# Altium PCB ESC.PcbDoc (part 2 of 2)
Units mil, origin at the board's own origin, x right, y up, seen from the top; angles counter-clockwise.
Board outline 7000 x 5000 mil, 2 copper layers (Top Layer, Bottom Layer), stack 64.567 mil thick; 83 components, 105 nets, 405 pads, 157 vias.
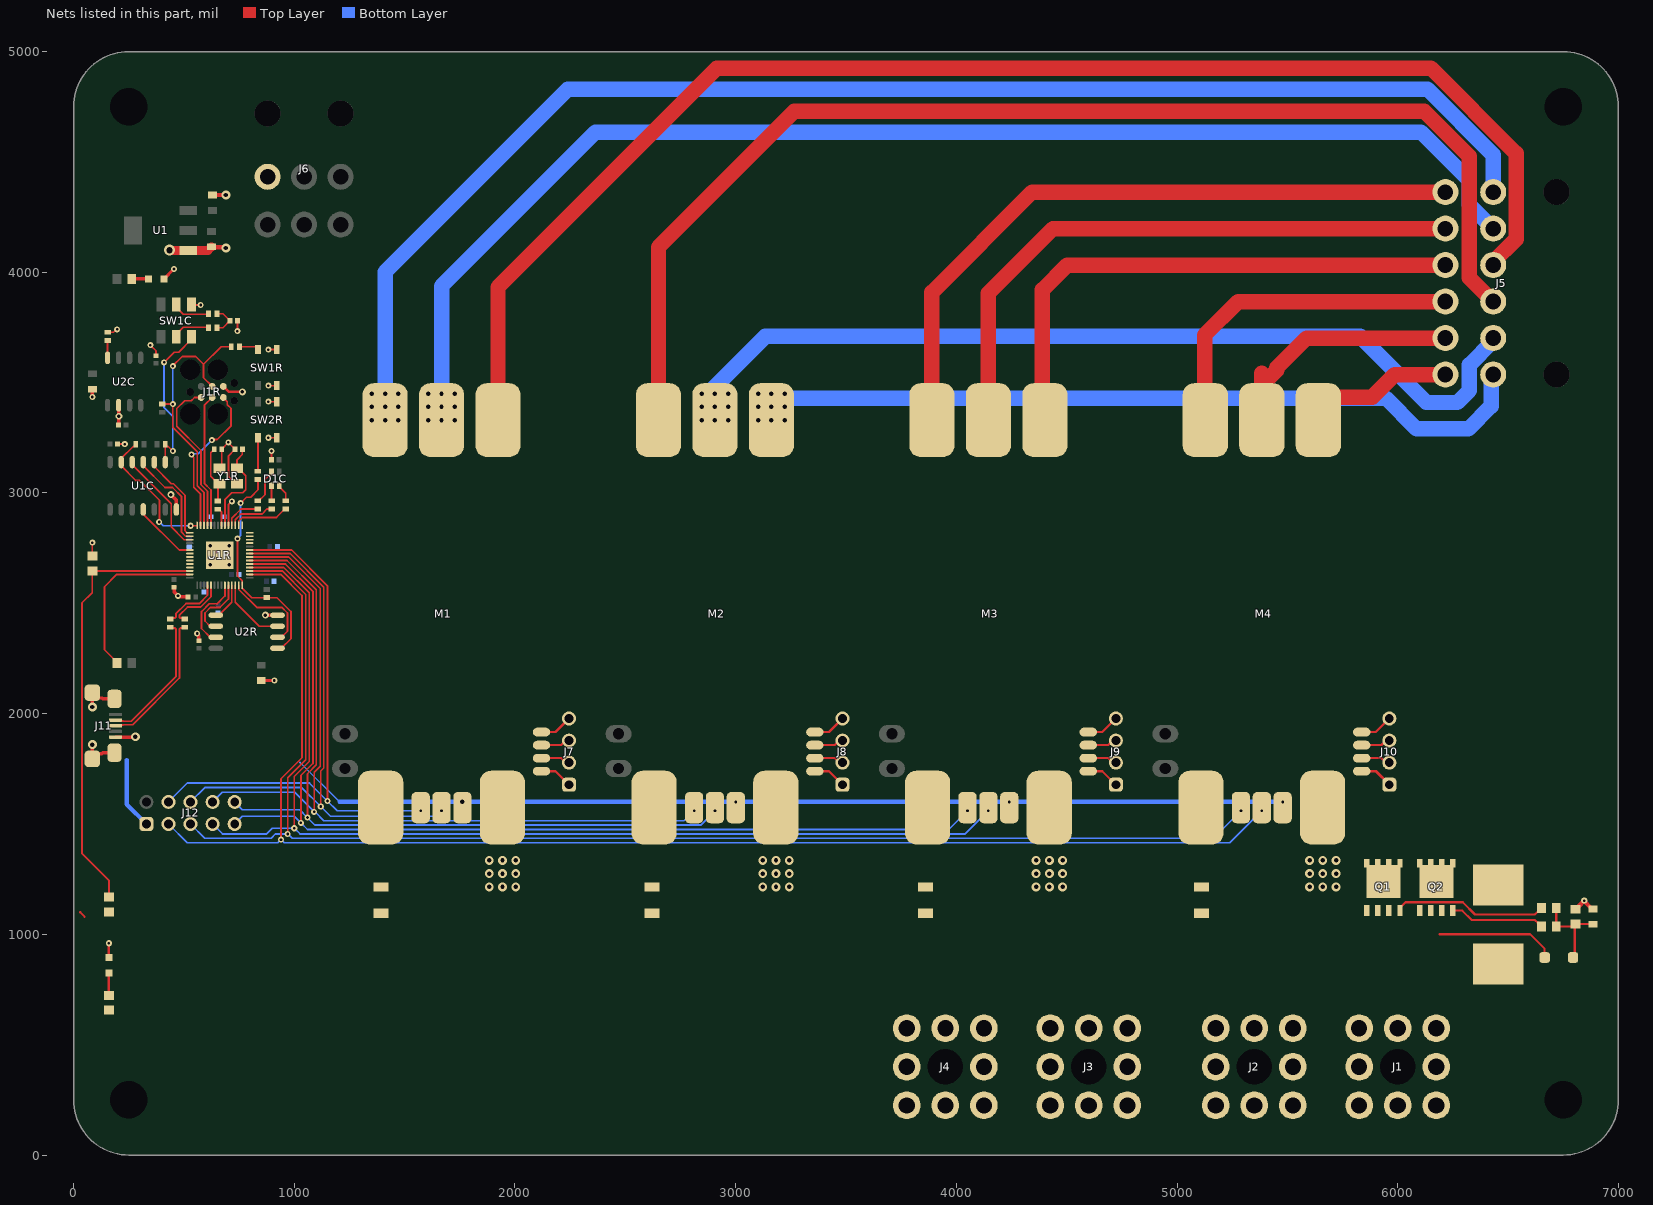
[diagram p2: the nets of this part, all layers, seen from the top]

## Via types
v1: diameter 40, hole 20, Top Layer to Bottom Layer, tented both sides, 81 vias
v2: diameter 27.56, hole 11.81, Top Layer to Bottom Layer, tented both sides, 34 vias
v3: diameter 28, hole 12, Top Layer to Bottom Layer, tented both sides, 25 vias
v4: diameter 31.5, hole 15.75, Top Layer to Bottom Layer, tented both sides, 10 vias
v5: diameter 45.28, hole 27.56, Top Layer to Bottom Layer, tented both sides, 6 vias
v6: diameter 50, hole 28, Top Layer to Bottom Layer, tented both sides, 1 vias

## Nets (pads, with @x,y where several pads share a name; then routed paths per layer and width w, separated by ;. In a path a pad name is that pad's centre, name@x,y a point inside that pad or via, vN(x,y) a via of type N, cw(c..) or ccw(c..) an arc to the next point about the centre after c; other vN are vias at no path point) (continued)
DBG_TX_RP2040: J1R.5 U1R.27 | length 714.8
  Top Layer w7.87: v2(534.17,3174.36) 534.17,3169.74 544.02,3159.9 544.02,3025.49 575.51,2993.99 U1R.27@575.51,2853 ; v2(626.32,3239.32) 629.47,3242.46 651.49,3242.46 713.7,3304.68 713.7,3382.86 696.83,3399.73 696.83,3412.76 678.27,3431.32 J1R.5@678.27,3432.82
  Bottom Layer w7.87: v2(534.17,3174.36) 537.9,3178.09 565.09,3178.09 v2(626.32,3239.32)
dGND: C1C.2 C1R.2 C2.2 C2C.1 C2R.2 C3.2 C3C.2 C3R.2 C4C.2 C4R.2 C5C.2 C5R.2 C6.2 C6R.2 C7.2 C7R.2 C8R.2 C9R.2 C10R.2 C11R.2 C12R.2 C13R.2 D3.2 J1R.6 J6.1 J11.5 J11.6 J11.7 J11.8 J11.9 J12.1 M1.10 M2.10 M3.10 M4.10 R4.2 R6C.2 SW1C.6 SW1R.B1 SW1R.B2 SW2R.B1 SW2R.B2 U1.1 U1C.7 U1R.19 U1R.57 U2C.2 U2R.4 Y1R.2 Y1R.4 | length 7202.2
  Top Layer w7.87: R4.2@85,2713.8 v3(85,2775) ; R6C.2@154.06,3728.49 180.63,3728.49 193.43,3741.29 v2(197.56,3741.29) ; v2(347.79,3669.8) 373.47,3644.11 373.47,3622.22 C3C.2@373.94,3621.76 ; SW1C.6@534.17,3853.49 536.14,3851.52 v2(575.51,3851.52) ; U1R.57@701.5,2764.91 v4(705.43,2760.97) ; U1R.19@701.5,2853 701.5,2946.01 v2(717.24,2961.76) ; v2(742.24,3733.41) C2C.1@742.24,3780.66 ; v2(882.6,3250.14) SW2R.B1@920,3250.14 ; v2(882.6,3413.53) SW2R.B2@920,3413.53 ; v2(882.6,3486.37) 916.14,3486.37 SW1R.B1@916.26,3486.25 ; v2(882.6,3649.75) SW1R.B2@920,3649.75
  Top Layer w8: C1C.2@196.81,3221.6 C1C.2@198.94,3221.6 v2(231.81,3221.6) ; Y1R.2@660.87,3111.37 671.38,3121.88 C2R.2@671.38,3197.98 671.38,3198.77 v2@701.5,3228.88 ; v2(701.5,3229.48) v2@701.5,3228.88 ; Y1R.4@740.87,3041.37 734.96,3041.37 701.43,3074.89 701.43,3167.01 731.61,3197.19 C1R.2@731.61,3197.98 731.61,3198.77 v2@701.5,3228.88 ; SW1R.B1@916.26,3486.25 SW1R.B1@918.94,3488.92
  Top Layer w9.84: C5C.2@896.97,3150.74 v2(896.97,3190.11)
  Top Layer w11.81: J1R.6@678.27,3482.82 703.18,3457.91 v4(764.81,3457.91)
  Top Layer w15: v1(85,1860) J11.8@85,1795.39 108.59,1818.99 127.43,1818.99 131.4,1822.95 J11.7@185.39,1822.95 ; v1(85,2030) J11.9@85,2094.61 108.59,2071.01 127.43,2071.01 131.4,2067.05 J11.6@185.39,2067.05 ; v3(85,3435) C3.2@85,3470 ; D3.2@410,3970 v3(455,4015) ; C2.2@850,2150 v3(910,2150)
  Top Layer w15.75: J11.5@190.32,1893.82 278.82,1893.82 v1(280,1895) ; C4C.2@204.06,3308.22 204.74,3308.9 204.74,3346.9 v4(205.43,3347.59) 204.74,3348.27 204.74,3397.09 U2C.2@204.06,3397.78 ; v4(441.12,2992.73) 465.67,2968.18 U1C.7@465.67,2925.34 ; C10R.2@457.4,2574.55 457.18,2574.33 457.18,2549.58 v2(473.15,2533.61) 476.35,2533.61 481.27,2528.69 C4R.2@519.02,2528.69 ; v2(559.76,2363.33) 567.64,2355.46 C3R.2@567.64,2330.46 ; v4(868.72,2446.21) U2R.4@923.99,2446.21
  Top Layer w20: C7.2@625,4115 627.5,4112.5 687.5,4112.5 v1(690,4110) ; C6.2@630,4350 v1(690,4350)
  Top Layer w40: v6(435,4100) 435.75,4099.25 519.18,4099.25 U1.1@519.49,4098.94 608.94,4098.94 C7.2@625,4115
  Bottom Layer w8: 1026.12,1778.88 1205,1600
  Bottom Layer w20: 240,1790 240,1590 J12.1@330,1500 ; 1205,1600 v1(1761.73,1600) v3(3000.68,1600) v3(4239.63,1600) v3(5478.58,1600)
  other v4: 618.82,2674.36 705.43,2674.36 618.82,2760.97
ESC1_P1: J5.1 M1.3 | length 6268.1
  Bottom Layer w70: v1(1411.34,3390) v1(1411.34,3450) 1411.34,4001.34 2240,4830 6135,4830 6432.6,4532.4 J5.1@6432.6,4363.39
  other v1: 1351.34,3330 1411.34,3330 1471.34,3330 1351.34,3390 1471.34,3390 1351.34,3450 1471.34,3450
ESC1_P2: J5.2 M1.4 | length 5846.7
  Bottom Layer w70: v1(1667.24,3390) 1667.24,3937.24 2365,4635 6105,4635 6325,4415 6325,4305.63 J5.2@6432.6,4198.03
  other v1: 1607.24,3330 1667.24,3330 1727.24,3330 1607.24,3390 1727.24,3390 1607.24,3450 1667.24,3450 1727.24,3450
ESC1_P3: J5.3 M1.5 | length 6336.4
  Top Layer w70: M1.5@1923.15,3330 1923.15,3455.98 1923.15,3499.29 1923.15,3542.6 1923.15,3933.15 2130,4140 2915,4925 6150,4925 6536.65,4538.35 6536.65,4149.75 6432.6,4045.7 J5.3@6432.6,4032.68
ESC1_PWM: J12.6 M1.9 U1R.8 | length 2641.8
  Top Layer w7.87: U1R.8@797.46,2725.54 981.66,2725.54 1133.77,2573.42 1133.77,1753.77 1120,1740 v3(1120,1579.13) ; v3(1667.24,1560) M1.9@1667.24,1574.09
  Bottom Layer w7.87: J12.6@530,1600 595,1665 1034.13,1665 v3(1120,1579.13) 1164.13,1535 1642.24,1535 v3(1667.24,1560)
ESC1_TELEM: J12.4 M1.8 U1R.9 | length 2639.1
  Top Layer w7.87: U1R.9@797.46,2741.29 988.38,2741.29 1150.24,2579.43 1150.24,2575.66 v3(1150.24,1604.13) ; v3(1572.76,1560.81) M1.8@1572.76,1574.09
  Bottom Layer w7.87: J12.4@430,1600 515.75,1685.75 1068.61,1685.75 v3(1150.24,1604.13) 1194.36,1560 1571.94,1560 v3(1572.76,1560.81)
ESC2_P1: J5.4 M2.3 | length 5501.2
  Top Layer w70: M2.3@2650.29,3330 2650.29,3455.98 2650.29,3499.29 2650.29,3542.6 2650.29,4114.3 3265.99,4730 6120,4730 6325,4525 6325,3974.92 J5.4@6432.6,3867.32
ESC2_P2: J5.5 M2.4 | length 4033.4
  Bottom Layer w70: v1(2906.19,3390) 2906.19,3481.19 3135,3710 5830,3710 6130,3410 6270,3410 6324.4,3464.4 6324.4,3580.75 6432.6,3688.95 J5.5@6432.6,3701.97
  other v1: 2846.19,3330 2906.19,3330 2966.19,3330 2846.19,3390 2966.19,3390 2846.19,3450 2906.19,3450 2966.19,3450
ESC2_P3: J5.6 M2.5 | length 3577.4
  Bottom Layer w70: v1(3162.1,3390) v1(3162.1,3450) v1(3222.1,3450) 3242.1,3430 5945.93,3430 6085.93,3290 6320,3290 6423.39,3393.39 6423.39,3527.41 J5.6@6432.6,3536.61
  other v1: 3102.1,3330 3162.1,3330 3222.1,3330 3102.1,3390 3222.1,3390 3102.1,3450
ESC2_PWM: J12.10 M2.9 U1R.6 | length 3667
  Top Layer w7.87: U1R.6@797.46,2694.04 967.18,2694.04 1100.13,2561.09 1100.13,1767.86 1060,1727.73 v3(1060,1529.13)
  Top Layer w8: v3(2906.19,1560) M2.9@2906.19,1574.09
  Bottom Layer w7.87: J12.10@730,1600 765,1565 1024.13,1565 v3(1060,1529.13) 1094.13,1495 ; 2841.19,1495 v3(2906.19,1560)
  Bottom Layer w8: 1094.13,1495 2841.19,1495
ESC2_TELEM: J12.8 M2.8 U1R.7 | length 3688.1
  Top Layer w7.87: U1R.7@797.46,2709.79 974.42,2709.79 1117.31,2566.9 1117.31,1762.31 1090,1735 v3(1090,1555) ; v3(2811.71,1560) M2.8@2811.71,1574.09
  Bottom Layer w7.87: J12.8@630,1600 673.7,1643.7 1001.3,1643.7 v3(1090,1555) 1094.15,1555 1134.15,1515 2765.85,1515 2810.85,1560 v3(2811.71,1560)
ESC3_P1: J5.7 M3.3 | length 3094.2
  Top Layer w70: M3.3@3889.24,3330 3889.24,3455.98 3889.24,3499.29 3889.24,3542.6 3889.24,3909.24 4343.39,4363.39 J5.7@6216.06,4363.39
ESC3_P2: J5.8 M3.4 | length 2767.4
  Top Layer w70: M3.4@4145.14,3330 4145.14,3455.98 4145.14,3499.29 4145.14,3542.6 4145.14,3905.14 4438.03,4198.03 J5.8@6216.06,4198.03
ESC3_P3: J5.9 M3.5 | length 2467.3
  Top Layer w70: M3.5@4401.05,3330 4390,3341.05 4390,3920 4502.68,4032.68 J5.9@6216.06,4032.68
ESC3_PWM: J12.7 M3.9 U1R.4 | length 5025.6
  Top Layer w7.87: U1R.4@797.46,2662.55 952.71,2662.55 1067.92,2547.33 1067.92,1782.92 1000,1715 v3(1000,1480.87)
  Top Layer w8: v3(4145.14,1560) M3.9@4145.14,1574.09
  Bottom Layer w7.87: J12.7@630,1500 675,1455 875,1455 900.87,1480.87 v3(1000,1480.87) 1025.87,1455 ; 4045.42,1460.28 v3(4145.14,1560)
  Bottom Layer w8: 1025.87,1455 4040.14,1455 4045.42,1460.28
ESC3_TELEM: J12.9 M3.8 U1R.5 | length 4819.2
  Top Layer w7.87: U1R.5@797.46,2678.29 959.95,2678.29 1084.39,2553.85 1084.39,1774.39 1030,1720 v3(1030,1505)
  Top Layer w8: v3(4050.66,1560) M3.8@4050.66,1574.09
  Bottom Layer w7.87: J12.9@730,1500 765,1535 1000,1535 v3(1030,1505) 1060,1475 ; 3975.9,1485.24 v3(4050.66,1560)
  Bottom Layer w8: 1060,1475 3965.66,1475 3975.9,1485.24
ESC4_P1: J5.10 M4.3 | length 1540.5
  Top Layer w70: M4.3@5128.19,3330 5125,3333.19 5125,3715 5277.32,3867.32 J5.10@6216.06,3867.32
ESC4_P2: J5.11 M4.4 | length 1134.7
  Top Layer w70: M4.4@5384.09,3330 5384.09,3455.98 5384.09,3499.09 5405.85,3520.85 5416.58,3520.85 5451.46,3555.73 5451.46,3566.46 5586.97,3701.97 J5.11@6216.06,3701.97 ; 5384.09,3499.29 5384.09,3520.85 5384.09,3542.6
ESC4_P3: J5.12 M4.5 | length 684.2
  Top Layer w70: M4.5@5640,3330 5640,3368.48 5706.13,3434.61 5884.61,3434.61 5986.61,3536.61 J5.12@6216.06,3536.61
ESC4_PWM: J12.3 M4.9 U1R.2 | length 6483.1
  Top Layer w7.87: U1R.2@797.46,2631.05 938.95,2631.05 1035,2535 1035,1800 940,1705 v3(940,1429.13)
  Bottom Layer w8: J12.3@430,1500 515,1415 925.31,1415 939.44,1429.13 v3(940,1429.13) ; v3@940.56,1429.13 954.69,1415 5239.09,1415 v3(5384.09,1560)
ESC4_TELEM: J12.5 M4.8 U1R.3 | length 6286.1
  Top Layer w7.87: U1R.3@797.46,2646.8 945.47,2646.8 1050.75,2541.52 ; v3(970,1455) 970,1710 1051.46,1791.46 1051.46,2541.52
  Top Layer w8: v3(5289.61,1560) M4.8@5289.61,1574.09
  Bottom Layer w7.87: J12.5@530,1500 595,1435 895,1435 915,1455 v3(970,1455) 990,1435 ; 5177.44,1447.83 v3(5289.61,1560)
  Bottom Layer w8: 990,1435 5164.61,1435 5177.44,1447.83
GND: C1.1 D1.2 J3.1 J4.1 M1.2 M2.2 M3.2 M4.2 R2.2 | length 179.7
  Top Layer w12: D1.2@160,895 v3(160,960)
  Top Layer w20: R2.2@6805,1113.5 6807.5,1113.5 6817.5,1123.5 6817.5,1125.34 v3(6845,1152.84) 6845,1150.67 6857.5,1138.17 6857.5,1137.5 6880,1115 C1.1@6885,1115
  other v1: 1883.68,1215 1943.68,1215 2003.68,1215 3122.63,1215 3182.63,1215 3242.63,1215 4361.58,1215 4421.58,1215 4481.58,1215 5600.53,1215 5660.53,1215 5720.53,1215 1883.68,1275 1943.68,1275 2003.68,1275 3122.63,1275 3182.63,1275 3242.63,1275 4361.58,1275 4421.58,1275 4481.58,1275 5600.53,1275 5660.53,1275 5720.53,1275 1883.68,1335 1943.68,1335 2003.68,1335 3122.63,1335 3182.63,1335 3242.63,1335 4361.58,1335 4421.58,1335 4481.58,1335 5600.53,1335 5660.53,1335 5720.53,1335
INT_RP2CAN: U1C.4 U1R.34 | length 297.2
  Top Layer w7.87: U1C.4@315.67,2925.34 315.67,2904.35 478.73,2741.29 U1R.34@524.33,2741.29
LEDB_RP2CAN: R8C.1 U1R.18 | length 168.1
  Top Layer w7.87: U1R.18@717.24,2853 717.24,2885.86 758.7,2927.31 R8C.1@835.35,2927.31
LEDG_RP2CAN: R7C.1 U1R.17 | length 213.3
  Top Layer w7.87: U1R.17@732.99,2853 732.99,2879.33 758.33,2904.67 855.01,2904.67 864.87,2914.53 864.87,2917.45 874.72,2927.31 R7C.1@898.35,2927.31
LEDR_RP2CAN: R5C.1 U1R.16 | length 255
  Top Layer w7.87: U1R.16@748.74,2853 748.74,2872.81 764.86,2888.92 919.02,2888.92 957.4,2927.31 R5C.1@961.34,2927.31
MISO_RP2CAN: U1C.12 U1R.31 | length 475
  Top Layer w7.87: U1C.12@265.67,3139.91 265.67,3127.44 442.05,2951.06 442.05,2846.94 500.46,2788.53 U1R.31@526.79,2788.53
MOSI_RP2CAN: U1C.11 U1R.30 | length 454.6
  Top Layer w7.87: U1C.11@315.67,3139.91 315.67,3123.18 414.09,3024.75 448.07,3024.75 489.29,2983.53 489.29,2821.97 506.98,2804.28 U1R.30@526.79,2804.28
nCS_RP2CAN: R4C.2 U1C.13 U1R.28 | length 646.2
  Top Layer w7.87: R4C.2@281.22,3221.6 281.22,3217.66 274.33,3210.77 269.8,3210.77 215.67,3156.64 U1C.13@215.67,3139.91 215.67,3123.18 282.86,3055.99 300.18,3055.99 389.29,2966.88 389.29,2870.03 v2(387.74,2868.47) ; v2(530.63,2851.52) 559.76,2851.52 U1R.28@559.76,2853
  Bottom Layer w7.87: v2(387.74,2868.47) 390.03,2868.47 406.98,2851.52 v2(530.63,2851.52)
NetC1_2: C1.2 D2.1 R2.1 R5.2 R6.1 | length 419.9
  Top Layer w10: R5.2@6718.5,1120 R6.1@6718.5,1035 6793.5,1035 R2.1@6802.24,1043.74 ; D2.1@6794.37,895 6802.24,902.87 R2.1@6802.24,1043.74 ; R2.1@6807.24,1046.5 6883.5,1046.5 C1.2@6885,1045 ; R2.1@6814.37,1037.13 R2.1@6805,1046.5 R2.1@6802.24,1043.74
NetC2C_2: C2C.2 R2C.2 R3C.2 | length 144.3
  Top Layer w7.87: R2C.2@649.33,3749.16 677.28,3749.16 707.99,3779.87 C2C.2@707.99,3780.66 707.99,3781.44 677.28,3812.15 R3C.2@649.33,3812.15
NetC2R_1: C2R.1 R1R.2 Y1R.3 | length 263.4
  Top Layer w8: C2R.1@637.13,3197.98 637.13,3197.19 621.43,3181.5 621.43,3074.89 654.96,3041.37 Y1R.3@660.87,3041.37 654.25,3034.75 R1R.2@654.25,2963.65
NetD1_1: D1.1 R1.2 | length 98.2
  Top Layer w12: R1.2@160,726.81 D1.1@160,825
NetD1C_1: D1C.1 R5C.2 | length 80.1
  Top Layer w7.87: D1C.1@931.81,3032.62 931.81,3027.7 961.34,2998.18 R5C.2@961.34,2964.71
NetD1C_2: D1C.2 R7C.2 | length 68.7
  Top Layer w7.87: D1C.2@896.38,3032.62 896.38,2966.68 R7C.2@898.35,2964.71
NetD1C_3: D1C.3 R8C.2 | length 158.5
  Top Layer w7.87: R8C.2@835.35,2964.71 839.29,2964.71 867.83,2993.26 867.83,3062.15 896.38,3090.7 D1C.3@896.38,3095.62
NetD3_1: D3.1 R7.1 | length 76.5
  Top Layer w15: R7.1@263.5,3970 D3.1@340,3970
NetF1_2: F1.2 M1.1
NetF2_2: F2.2 M2.1
NetF3_2: F3.2 M3.1
NetF4_2: F4.2 M4.1
NetF5_2: F5.2 Q1.D Q2.D
NetJ7_1: J7.1 M1.11 | length 150.4
  Top Layer w10: M1.11@2120,1739.45 2183.58,1739.45 J7.1@2245,1678.03
NetJ7_2: J7.2 M1.12 | length 133.5
  Top Layer w10: M1.12@2120,1798.5 2209.97,1798.5 2230.45,1778.03 J7.2@2245,1778.03
NetJ7_3: J7.3 M1.13 | length 133.5
  Top Layer w10: M1.13@2120,1857.56 2209.97,1857.56 2230.45,1878.03 J7.3@2245,1878.03
NetJ7_4: J7.4 M1.14 | length 150.4
  Top Layer w10: M1.14@2120,1916.61 2183.58,1916.61 J7.4@2245,1978.03
NetJ8_1: J8.1 M2.11 | length 150.4
  Top Layer w10: M2.11@3358.95,1739.45 3422.53,1739.45 J8.1@3483.95,1678.03
NetJ8_2: J8.2 M2.12 | length 133.5
  Top Layer w10: M2.12@3358.95,1798.5 3448.93,1798.5 3469.4,1778.03 J8.2@3483.95,1778.03
NetJ8_3: J8.3 M2.13 | length 133.5
  Top Layer w10: M2.13@3358.95,1857.56 3448.92,1857.56 3469.4,1878.03 J8.3@3483.95,1878.03
NetJ8_4: J8.4 M2.14 | length 150.4
  Top Layer w10: M2.14@3358.95,1916.61 3422.53,1916.61 J8.4@3483.95,1978.03
NetJ9_1: J9.1 M3.11 | length 150.4
  Top Layer w10: M3.11@4597.9,1739.45 4661.48,1739.45 J9.1@4722.9,1678.03
NetJ9_2: J9.2 M3.12 | length 133.5
  Top Layer w10: M3.12@4597.9,1798.5 4687.88,1798.5 4708.35,1778.03 J9.2@4722.9,1778.03
NetJ9_3: J9.3 M3.13 | length 133.5
  Top Layer w10: M3.13@4597.9,1857.56 4687.87,1857.56 4708.35,1878.03 J9.3@4722.9,1878.03
NetJ9_4: J9.4 M3.14 | length 150.4
  Top Layer w10: M3.14@4597.9,1916.61 4661.48,1916.61 J9.4@4722.9,1978.03
NetJ10_1: J10.1 M4.11 | length 150.4
  Top Layer w12: M4.11@5836.85,1739.45 5900.43,1739.45 J10.1@5961.85,1678.03
NetJ10_2: J10.2 M4.12 | length 133.5
  Top Layer w10: M4.12@5836.85,1798.5 5926.83,1798.5 5947.3,1778.03 J10.2@5961.85,1778.03
NetJ10_3: J10.3 M4.13 | length 133.5
  Top Layer w10: M4.13@5836.85,1857.56 5926.82,1857.56 5947.3,1878.03 J10.3@5961.85,1878.03
NetJ10_4: J10.4 M4.14 | length 150.4
  Top Layer w10: M4.14@5836.85,1916.61 5900.43,1916.61 J10.4@5961.85,1978.03
NetQ1_4: Q1.4 R5.1 | length 701.6
  Top Layer w10: Q1.4@6010,1107.5 6010,1120.5 6034.87,1145.37 6294.63,1145.37 6350,1090 6621.5,1090 6634,1102.5 6636.5,1102.5 6651.5,1117.5 R5.1@6651.5,1120
NetQ2_4: Q2.4 R6.2 | length 433
  Top Layer w10: Q2.4@6250,1107.5 6292.5,1107.5 6335,1065 6621.5,1065 6634,1052.5 6636.5,1052.5 6651.5,1037.5 R6.2@6651.5,1035
NetR2C_1: R2C.1 SW1C.2 | length 172.3
  Top Layer w7.87: SW1C.2@465.28,3707.82 465.28,3719.63 496.77,3751.13 609.96,3751.13 R2C.1@611.93,3749.16
NetR3C_1: R3C.1 SW1C.5 | length 172.3
  Top Layer w7.87: SW1C.5@465.28,3853.49 465.28,3841.68 496.77,3810.18 609.96,3810.18 R3C.1@611.93,3812.15
NetR6C_1: R6C.1 U2C.8 | length 78.7
  Top Layer w7.87: U2C.8@154.06,3612.35 R6C.1@154.06,3691.09
NetR6R_1: R6R.1 SW1R.A2 | length 91.3
  Top Layer w7.87: R6R.1@751.69,3662.55 826.5,3662.55 835.35,3653.69 SW1R.A2@835.35,3649.75
NetR7R_1: R7R.1 SW2R.A1 | length 151.6
  Top Layer w7.87: R7R.1@835.35,3098.57 SW2R.A1@835.35,3250.14
NetSB1_1: SB1.1 U1R.41 | length 778.4
  Top Layer w7.87: SB1.1@196.5,2230 196.5,2232.5 140,2289 140,2575 196.05,2631.05 U1R.41@526.79,2631.05
NetU1R_11: U1R.11
NetU1R_12: U1R.12
NetU1R_13: U1R.13
NetU1R_14: U1R.14
NetU1R_15: U1R.15
NetU1R_35: U1R.35
NetU1R_36: U1R.36
NetU1R_37: U1R.37
NetU1R_38: U1R.38
NetU1R_39: U1R.39
QSPI_SCLK_RP2040: U1R.52 U2R.6 | length 286.6
  Top Layer w7.87: U2R.6@640.47,2396.21 618.82,2396.21 595.2,2419.83 595.2,2455.99 620.65,2481.44 663.31,2481.44 701.5,2519.63 U1R.52@701.5,2582.33
QSPI_SD0_RP2040: U1R.53 U2R.5 | length 178.4
  Top Layer w7.87: U2R.5@640.47,2446.21 658.39,2446.21 717.24,2505.07 U1R.53@717.24,2582.33
QSPI_SD1_RP2040: U1R.55 U2R.2 | length 427.3
  Top Layer w7.87: U1R.55@748.74,2582.33 748.74,2562.52 829.82,2481.44 943.82,2481.44 969.27,2455.99 969.27,2386.42 969.21,2386.37 969.21,2373.77 941.65,2346.21 U2R.2@920,2346.21
QSPI_SD2_RP2040: U1R.54 U2R.3 | length 309.4
  Top Layer w7.87: U1R.54@732.99,2582.33 732.99,2505.07 841.85,2396.21 U2R.3@920,2396.21
QSPI_SD3_RP2040: U1R.51 U2R.7 | length 339.2
  Top Layer w7.87: U2R.7@640.47,2346.21 618.82,2346.21 579.45,2385.58 579.45,2462.52 614.62,2497.68 650.58,2497.68 685.75,2532.85 U1R.51@685.75,2582.33
QSPI_SS_RP2040: R5R.2 R7R.2 U1R.56 U2R.1 | length 1007.5
  Top Layer w7.87: v2(742.84,2793.11) 742.84,2623.79 764.49,2602.14 U1R.56@764.49,2582.33 ; v2(756.61,2953.88) 783.74,2981.01 802.15,2981.01 835.35,3014.21 R7R.2@835.35,3061.17 ; U1R.56@764.49,2569.04 807.8,2525.74 R5R.2@874.72,2525.74 921.8,2525.74 985.02,2462.52 985.02,2339.57 941.65,2296.21 U2R.1@920,2296.21
  Bottom Layer w7.87: v2(742.84,2793.11) 742.84,2793.78 756.61,2807.56 v2(756.61,2953.88)
RUN_RP2040: J1R.4 R4R.2 R6R.2 U1R.26 | length 1275.3
  Top Layer w7.87: R4R.2@402.28,3402.7 v2(449.53,3402.7) 449.53,3297.16 559.76,3186.93 559.76,3032.01 591.26,3000.51 U1R.26@591.26,2853 ; v2(449.53,3574.61) 449.53,3575.93 491.85,3618.26 553.3,3618.26 588.7,3582.86 ; J1R.4@628.27,3482.82 588.7,3522.38 588.7,3582.86 ; R6R.2@714.29,3662.55 668.4,3662.55 588.7,3582.86
  Bottom Layer w7.87: v2(449.53,3402.7) v2(449.53,3574.61)
SCK_RP2CAN: U1C.10 U1R.29 | length 400.1
  Top Layer w7.87: U1C.10@365.67,3139.91 365.67,3119.66 443.04,3042.29 452.81,3042.29 505.04,2990.06 505.04,2828.49 513.5,2820.03 U1R.29@526.79,2820.03
SWCLK_RP2040: J1R.3 U1R.24 | length 606.9
  Top Layer w7.87: U1R.24@622.76,2853 622.76,3013.56 592.83,3043.48 592.83,3397.38 J1R.3@628.27,3432.82
SWDIO_RP2040: J1R.1 U1R.25 | length 718.6
  Top Layer w7.87: J1R.1@578.27,3432.82 547.73,3432.82 533.16,3418.26 503.23,3418.26 467.83,3382.86 467.83,3301.61 577.08,3192.36 577.08,3036.96 607.01,3007.04 U1R.25@607.01,2853
TERM_DET_RP2CAN: R1C.2 SW1C.3 U1C.9 | length 723.9
  Top Layer w7.87: v2(410.16,3591.68) 456.23,3637.75 475.91,3637.75 534.17,3696.01 SW1C.3@534.17,3707.82 ; U1C.9@415.67,3139.91 R1C.2@415.67,3217.66 ; R1C.2@415.67,3221.6 R1C.2@415.67,3217.66 ; v2(449.53,3190.11) 428.86,3210.77 422.56,3210.77 R1C.2@415.67,3217.66
  Bottom Layer w7.87: v2(410.16,3591.68) 410.16,3386.96 449.53,3347.59 v2(449.53,3190.11)
USB_N: J11.2 R3R.1 | length 602.9
  Top Layer w8: J11.2@190.32,1970.59 194.19,1966.72 223.54,1966.72 224.47,1965.8 261.34,1965.8 463.64,2168.09 463.64,2383.29 458.95,2387.98 442.54,2387.98 R3R.1@438.64,2391.88
USB_P: J11.3 R2R.1 | length 629.4
  Top Layer w8: J11.3@190.32,1945 194.19,1948.87 223.54,1948.87 224.47,1949.8 267.97,1949.8 479.64,2161.46 479.64,2383.29 484.33,2387.98 500.75,2387.98 R2R.1@504.65,2391.88
USB_RP2040_N: R3R.2 U1R.46 | length 267.4
  Top Layer w7.87: R3R.2@438.64,2429.28 442.36,2433 459.15,2433 463.77,2437.61 463.77,2452.96 509.41,2498.6 568.68,2498.6 607.01,2536.93 U1R.46@607.01,2582.33
USB_RP2040_P: R2R.2 U1R.47 | length 267.4
  Top Layer w7.87: R2R.2@504.65,2429.28 500.92,2433 484.13,2433 479.51,2437.61 479.51,2446.44 515.93,2482.86 575.21,2482.86 622.76,2530.4 U1R.47@622.76,2582.33
VCC: D2.2 F1.1 F2.1 F3.1 F4.1 Q1.1 Q1.2 Q1.3 Q2.1 Q2.2 Q2.3 R1.1 R3.1 | length 570.5
  Top Layer w10: 30,1100 50,1080 ; 6190,1000 6600,1000 6665.63,934.37 D2.2@6665.63,895
VCC_MEAS: R3.2 R4.1 U1R.40 | length 1990.3
  Top Layer w7.87: R3.2@160,1168.5 160,1245 37.69,1367.31 37.69,2501.19 85,2548.5 R4.1@85,2646.8 U1R.40@526.79,2646.8
VIN: F5.1 J1.1 J2.1
XIN_RP2040: C1R.1 U1R.20 Y1R.1 | length 443.1
  Top Layer w7.87: U1R.20@685.75,2853 685.75,2969.63 717.24,3001.13 766.55,3001.13 780.24,3014.82 780.24,3077.9 746.77,3111.37 Y1R.1@740.87,3111.37 740.87,3150.64 764.59,3174.36 764.59,3196.7 C1R.1@765.87,3197.98
XOUT_RP2040: R1R.1 U1R.21 | length 82.1
  Top Layer w7.87: R1R.1@654.25,2926.25 658.19,2926.25 670,2914.44 U1R.21@670,2853
pads on no net: J1.8 J1R.A J1R.B J1R.C J1R.D J1R.E J1R.F J1R.G J2.8 J3.8 J4.8 J5. J6. J11.1 J11.4 M1.6 M1.7 M2.6 M2.7 M3.6 M3.7 M4.6 M4.7 SW1R.A1 SW2R.A2 U1C.3 U1C.5 U1C.8

## Polygon pours and split planes (outlines as drawn)
dGND on Bottom Layer "GND_RP2CAN" (solid, pour order 10): 0,1740 0,5000 1065,5000 1065,1740
GND on Bottom Layer "GND_L02_P004" (solid, pour order 4): 0,1375 0,0 7000,0 7000,1375
ESC2_P3 on Bottom Layer "ESC2_P3_L02_P035" (solid, pour order 35): 3059.74,3295 3059.74,3520 3127.1,3580 3197.1,3580 3264.46,3520 3264.46,3295
ESC2_P2 on Bottom Layer "ESC2_P2_L02_P034" (solid, pour order 34): 2803.83,3295 2803.83,3520 2871.19,3580 2941.19,3580 3008.56,3520 3008.56,3295
ESC1_P2 on Bottom Layer "ESC1_P2_L02_P033" (solid, pour order 33): 1564.88,3295 1564.88,3520 1632.24,3580 1702.24,3580 1769.61,3520 1769.61,3295
ESC1_P1 on Bottom Layer "ESC1_P1_L02_P032" (solid, pour order 32): 1308.98,3295 1308.98,3520 1376.34,3580 1446.34,3580 1513.7,3520 1513.7,3295
VIN on Top Layer "VIN_L01_P029" (solid, pour order 29): 5050,0 5050,650 5941.43,650 6220,853.12 6220,960 6585,960 6585,0
VCC on Top Layer "VCC_L01_P015" (solid, pour order 15): 0,1135 0,0 5050,0 5050,670 5932,670 6220,880 6220,1135
3V3 on Top Layer "3V3_RP2040" (solid, pour order 9): 45,2185 45,3666.09 1066.15,3666.09 1066.15,2185
NetF5_2 on Top Layer "NETF5_2_L01_P030" (solid, pour order 30): 5825,1585 5825,1160 6310,1160 6345,1125 6575,1125 6575,1585
GND on Top Layer "GND_L01_P028" (solid, pour order 28): 5558.03,1485 5558.03,1175 5763.03,1175 5763.03,1485
GND on Top Layer "GND_L01_P027" (solid, pour order 27): 4319.08,1485 4319.08,1175 4524.08,1175 4524.08,1485
GND on Top Layer "GND_L01_P025" (solid, pour order 25): 3080.13,1485 3080.13,1175 3285.13,1175 3285.13,1485
NetF4_2 on Top Layer "NETF4_2_L01_P024" (solid, pour order 24): 5006.85,1485 5006.85,1175 5211.85,1175 5211.85,1485
NetF3_2 on Top Layer "NETF3_2_L01_P023" (solid, pour order 23): 3767.9,1485 3767.9,1175 3972.9,1175 3972.9,1485
NetF2_2 on Top Layer "NETF2_2_L01_P022" (solid, pour order 22): 2528.95,1485 2528.95,1175 2733.95,1175 2733.95,1485
GND on Top Layer "GND_L01_P011" (solid, pour order 11): 1841.18,1485 1841.18,1175 2046.18,1175 2046.18,1485
NetF1_2 on Top Layer "NETF1_2_L01_P000" (solid, pour order 0): 1290,1485 1290,1175 1495,1175 1495,1485

## Keep-outs
Keep-Out Layer:
  region: 6750,500 ccw(c6750,250) 6500,250 6500,0 6750,0 ccw(c6750,250) 7000,250 7000,500
  region: 500,250 ccw(c250,250) 250,500 0,500 0,250 ccw(c250,250) 250,0 500,0
  region: 250,4500 ccw(c250,4750) 500,4750 500,5000 250,5000 ccw(c250,4750) 0,4750 0,4500
  region: 6500,4750 ccw(c6750,4750) 6750,4500 7000,4500 7000,4750 ccw(c6750,4750) 6750,5000 6500,5000
  lines w10: 6750,5000 cw(c6750,4750) 7000,4750 ; 6750,5000 cw(c6750,4750) 7000,4750 ; 6750,5000 250,5000 ccw(c250,4750) 0,4750 0,250 ccw(c250,250) 250,0 6750,0 ccw(c6750,250) 7000,250 7000,4750

## Other copper
Top Layer:
  pour cut-out: 150,2435 400,2185 50,2185 50,2445 150,2445
  pour cut-out: 3710,225 3775,160 4130,160 4190,225 4190,575 4130,640 3775,640 3710,575
  pour cut-out: 4360,225 4425,160 4780,160 4840,225 4840,575 4780,640 4425,640 4360,575
  pour cut-out: 664.71,2789.63 714.71,2839.63 759.71,2839.63 759.71,2749.63 724.71,2749.63
  pour cut-out: 771.8,2699.41 771.58,2699.63 554.83,2699.63 554.83,2647.02 582.15,2619.7 654.76,2619.7 669.83,2604.63 769.83,2604.63
  pour cut-out: 148.94,3129.63 148.94,2919.63 153.94,2914.63 403.94,2914.63 403.94,3054.63 343.94,3144.63
  pour cut-out: 784.62,2997.45 784.66,2997.48 805.05,2997.48 803.93,3198.05 792.42,3209.57 787.77,3209.57 787.77,3174 763.71,3149.94 763.71,3127.78 778.73,3112.76 778.73,3102.76
  pour cut-out: 526.09,3500.21 536.83,3496.15 569.72,3496.15 575.78,3502.21 575.78,3532.21 550.78,3532.21 540.78,3522.21
Bottom Layer:
  pour cut-out: 5760,225 5825,160 6180,160 6240,225 6240,575 6180,640 5825,640 5760,575
  pour cut-out: 5110,225 5175,160 5530,160 5590,225 5590,575 5530,640 5175,640 5110,575

## Silkscreen, mask and mechanical layers (free items; w line width, h text height)
Top Overlay:
  drawing of 80 lines, arcs and shapes, not listed
  text "GND" at 1660,4845 h54 r180
  text "CANL" at 1910,4845 h54 r180
  text "CANL" at 2160,4845 h54 r180
  text "5V" at 1660,4720 h54 r180
  text "CANH" at 1910,4720 h54 r180
  text "CANH" at 2160,4720 h54 r180
  text "ESC Stack / Link" at 2160,4511.83 h84 r180
  text "3.3V PWR LED" at 450.01,3882.02 h60
  text "ESC 4/8" at 5079.25,3724.24 h84
  text "ESC 1/5" at 1362.4,3705 h84
  text "ESC 2/6" at 2601.35,3705 h84
  text "ESC 3/7" at 3840.3,3705 h84
  text "TERM / ON" at 353.94,3702.35 h40 r90
  text "RESET" at 998.45,3474.75 h40 r90
  text "BOOT" at 998.45,3258.53 h40 r90
  text "ESC 3/7" at 6717.5,2935 h54 r90
  text "ESC 1/5" at 6842.5,2935 h54 r90
  text "Thruster SubConn" at 6524,2560 h84 r90
  text "ESC 4/8" at 6717.5,2535 h54 r90
  text "ESC 2/6" at 6842.5,2535 h54 r90
  text "FLASH / CONN" at 2145.7,2460 h40
  text "FLASH / CONN" at 3384.65,2460 h40
  text "FLASH / CONN" at 4623.6,2460 h40
  text "FLASH / CONN" at 5862.55,2460 h40
  text "5V" at 2170,2365 h40
  text "5V" at 3408.95,2365 h40
  text "5V" at 4647.9,2365 h40
  text "5V" at 5886.85,2365 h40
  text "RX" at 2170,2290 h40
  text "RX" at 3408.95,2290 h40
  text "RX" at 4647.9,2290 h40
  text "RX" at 5886.85,2290 h40
  text "TX" at 2170,2215 h40
  text "TX" at 3408.95,2215 h40
  text "TX" at 4647.9,2215 h40
  text "TX" at 5886.85,2215 h40
  text "GND" at 2170,2140 h40
  text "GND" at 3408.95,2140 h40
  text "GND" at 4647.9,2140 h40
  text "GND" at 5886.85,2140 h40
  text "Board ID Jumper" at 390,1998.02 h54
  text "Unpopulated: ID 0 /  (Thrusters 1-4) / Populated: ID 1 /  (Thrusters 5-8)" at 395,1661.82 h40
  text "Thruster / Config" at 6485,1627.61 h100 r90
  text "3V3" at 280,1415 h40 r270
  text "1T" at 380,1415 h40 r270
  text "1P" at 480,1415 h40 r270
  text "2T" at 580,1415 h40 r270
  text "2P" at 680,1415 h40 r270
  text "GND" at 280,1285 h40 r270
  text "4P" at 380,1285 h40 r270
  text "4T" at 480,1285 h40 r270
  text "3P" at 580,1285 h40 r270
  text "3T" at 680,1285 h40 r270
  text "Thruster / Power" at 241.83,1106.9 h84 r270
  text "ESC / GND" at 3975.09,670 h120
  text "ESC / V+" at 5375.09,670 h120
  text "The Underwater Robotics Team" at 1485.53,235 h60
  text "'.ProjectTitle'" at 1485,100 h60
  text "v'.BoardRevision'" at 2915.06,100 h60
Bottom Overlay:
  lines w20: 958.75,1846.25 1031.25,1773.75 ; 986.25,1773.75 1031.25,1773.75 ; 1031.25,1818.75 1031.25,1773.75
  text "If communication fails with the ESCs from the RP2040 block check this trace: / Intentional Reverse Polarity Fuse" at 930,1875 h30

## Text inside footprints (layer, text, board x,y; h text height)
J7: Top Overlay "1" at 2225,1608.03 h30 r90
J8: Top Overlay "1" at 3463.95,1608.03 h30 r90
J9: Top Overlay "1" at 4702.9,1608.03 h30 r90
J10: Top Overlay "1" at 5941.85,1608.03 h30 r90
J12: Top Overlay "1" at 261,1459 h30